# Altium PCB TRAY5 V4.PcbDoc
Units mm, origin at the board's own origin, x right, y up, seen from the top; angles counter-clockwise.
Board outline 187 x 33.02 mm, 2 copper layers (Top Layer, Bottom Layer), stack 1.571 mm thick; 50 components, 38 nets, 179 pads, 41 vias.
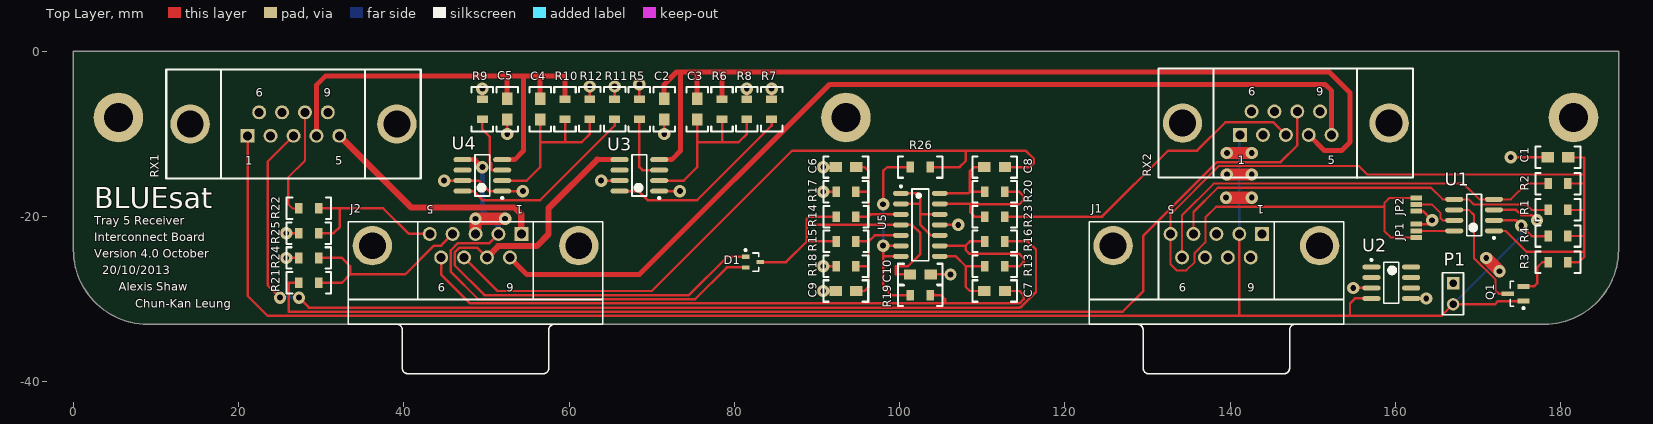
[diagram p0: Top Layer view]
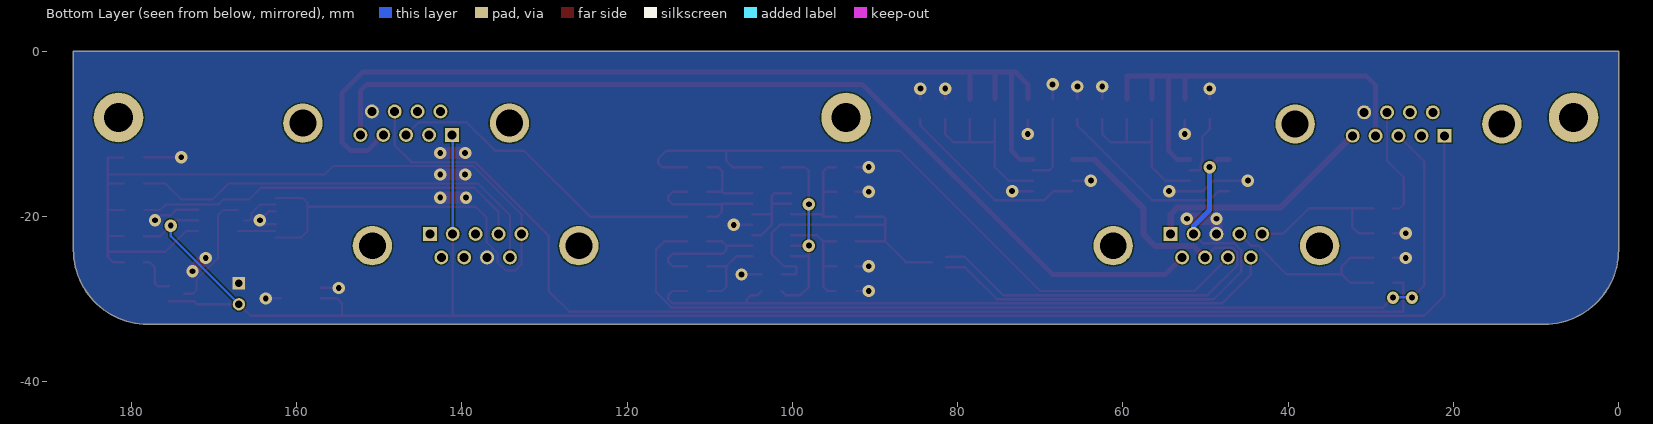
[diagram p1: Bottom Layer view, seen from below]

## Layer stack, top to bottom
Top Solder: solder mask 0.0102, Solder Resist, Dk 3.5
Top Layer: signal copper 0.0356
Dielectric1: core 1.5, FR-4, Dk 4.8
Bottom Layer: signal copper 0.0356
Bottom Solder: solder mask 0.0102, Solder Resist, Dk 3.5

## Board outline
9,-33.02 cw(c9,-24.02) 0,-24.02 0,0 187,0 187,-24.02 cw(c178,-24.02) 178,-33.02

## Design rules (kind name [scope] priority, off if disabled: settings)
Clearance [All] p1: gap=0.152
HoleSize [All] p1: absolutevalues=TRUE maxlimit=5 minlimit=0.3 maxpercent=80.000 minpercent=20.000
MinimumSolderMaskSliver [All] p1: minsoldermaskwidth=0.102
PolygonConnect [All] p1: connectstyle=Direct reliefconductorwidth=0.254 reliefentries=4 polygonreliefangle="90 Angle" airgapwidth=0.254
RoutingVias [All] p1: holewidth=0.4 width=0.6 viastyle="Through Hole" minholewidth=0.4 minwidth=0.6 maxholewidth=1 maxwidth=2
SilkToSilkClearance [All] p1: silktosilkclearance=0.1
SilkToSolderMaskClearance SilkscreenOverComponentPads [IsPad] p1: minsilkscreentomaskgap=0.254 clearancetoexposedcopper=TRUE
SolderMaskExpansion [All] p1: expansion=0.1
Width [All] p1: maxlimit=1.5 minlimit=0.203 preferedwidth=0.508
25 further rules are at their usual default settings.

## Classes and differential pairs
component class tempsens: U2
component class ADC: C1 JP1 JP2 P1 Q1 R1 R2 R3 R4 U1
component class Tray5: C2 C3 C4 C5 C6 C7 C8 C9 C10 D1 J1 J2 R5 R6 R7 R8 R9 R10 R11 R12 R13 R14 R15 R16 R17 R18 R19 R20 R21 R22 R23 R24 R25 R26 RX1 RX2 U3 U4 U5

## Components (designator, comment, footprint, x,y, rotation, side; value= is the part's Value field where it differs from the comment)
C1 "0805 Cap" "0805 Cap" 179.675,-12.825 r180 top
C2 "0805 Cap" "0805 Cap" 71.5,-7 r270 top
C3 "0805 Cap" "0805 Cap" 75.5,-7 r270 top
C4 "0805 Cap" "0805 Cap" 56.5,-7 r270 top
C5 "0805 Cap" "0805 Cap" 52.5,-7 r270 top
C6 "0805 Cap" "0805 Cap" 93.5,-14 r180 top
C7 "0805 Cap" "0805 Cap" 111.5,-29 r180 top
C8 "0805 Cap" "0805 Cap" 111.5,-14 r180 top
C9 "0805 Cap" "0805 Cap" 93.5,-29 r180 top
C10 "0805 Cap" "0805 Cap" 102.5,-27 r0 top
D1 "BAT54CW" NXP-SOT323-3_L 82.25,-25.5 r0 top
J1 "D Connector 9" DSUB1.385-2H9 138.33,-33.02 r180 top locked
J2 "D Connector 9" DSUB1.385-2H9 48.67,-33.02 r180 top locked
JP1 "Jumper Select" SOLDER_JUMPER_3_A 162.53,-21.715 r270 top
JP2 "Jumper Select" SOLDER_JUMPER_3_A 162.53,-18.54 r90 top
P1 "Header 2" HDR1X2 166.975,-28.065 r270 top
Q1 "DMP2004K" DMP2004KDITR-ND 174.595,-29.335 r180 top
R1 "0805 Resistor" "0805 Resistor" 179.675,-19.175 r180 top
R2 "0805 Resistor" "0805 Resistor" 179.675,-16 r180 top
R3 "0603 Resistor" "0805 Resistor" 179.675,-25.525 r180 top
R4 "0603 Resistor" "0805 Resistor" 179.675,-22.35 r180 top
R5 "0805 Resistor" "0805 Resistor" 68.5,-7 r270 top
R6 "0805 Resistor" "0805 Resistor" 78.5,-7 r270 top
R7 "0805 Resistor" "0805 Resistor" 84.5,-7 r90 top
R8 "0805 Resistor" "0805 Resistor" 81.5,-7 r90 top
R9 "0805 Resistor" "0805 Resistor" 49.5,-7 r270 top
R10 "0805 Resistor" "0805 Resistor" 59.5,-7 r270 top
R11 "0805 Resistor" "0805 Resistor" 65.5,-7 r90 top
R12 "0805 Resistor" "0805 Resistor" 62.5,-7 r90 top
R13 "0805 Resistor" "0805 Resistor" 111.5,-26 r180 top
R14 "0805 Resistor" "0805 Resistor" 93.5,-20 r0 top
R15 "0805 Resistor" "0805 Resistor" 93.5,-23 r0 top
R16 "0805 Resistor" "0805 Resistor" 111.5,-23 r180 top
R17 "0805 Resistor" "0805 Resistor" 93.5,-17 r180 top
R18 "0805 Resistor" "0805 Resistor" 93.5,-26 r180 top
R19 "0805 Resistor" "0805 Resistor" 102.5,-29.5 r180 top
R20 "0805 Resistor" "0805 Resistor" 111.5,-17 r180 top
R21 "0805 Resistor" "0805 Resistor" 28.5,-28 r0 top
R22 "0805 Resistor" "0805 Resistor" 28.5,-19 r0 top
R23 "0805 Resistor" "0805 Resistor" 111.5,-20 r180 top
R24 "0805 Resistor" "0805 Resistor" 28.5,-25 r180 top
R25 "0805 Resistor" "0805 Resistor" 28.5,-22 r180 top
R26 "0805 Resistor" "0805 Resistor" 102.5,-14 r180 top
RX1 "D Connector 9" "DSUB Upright" 26.641,-8.792 r180 top locked
RX2 "D Connector 9" "DSUB Upright" 146.736,-8.687 r180 top
U1 "DS24820Z+_ND" DS2482-100 169.515,-19.81 r180 top
U2 "TO-92" DS18S20 159.5,-28 r0 top
U3 "LT1120A" "SOIC8 - LT1120A" 68.5,-15 r180 top
U4 "LT1120A" "SOIC8 - LT1120A" 49.5,-15 r180 top
U5 "LM6134AIM/NOPB" M14A_L 102.5,-21 r0 top

## Footprints (in the part's own frame and the unit in brackets; to place one, negate y for a bottom-side part, rotate by r counter-clockwise, add the part's x,y. Pads: shape width x height; smd on the part's side, far side on the other; paste and mask are expansions set on the pad)
"0805 Cap" [mm] "0805 Capacitor"
  rect 1.5x1.25 smd: 1(1.25,0) 2(-1.25,0)
  silkscreen extent -2.7,-1.3 2.7,1.3, body extent -1,-0.63 1.1,0.63, height 0.9
"0805 Resistor" [mm] "0805 Resistor"
  rect 0.9x1.3 smd: 1(1.2,0) 2(-1.2,0)
  silkscreen extent -2.7,-1.3 2.7,1.3, body extent -1,-0.63 1.1,0.63, height 0.6
DMP2004KDITR-ND [mm] "SOT23, 3-Leads, Body 3.0x2.5mm (max), Pitch 0.89mm, IPC Medium Density"
  rect 1.5x0.6 smd: 1(-0.9,0.89) 2(-0.9,-0.89) 3(1,0)
  silkscreen extent -1.03,-1.5 0.7,1.86, body extent -0.7,-1.5 0.7,1.5, height 1.2
DS18S20 [mm] "SOIC, 8-Leads, Body 5.0x4.0mm (max), Pitch 1.27mm, IPC Medium Density"
  oval 2.2x0.6 smd: 1(-2.4,1.905) 2(-2.4,0.635) 3(-2.4,-0.635) 4(-2.4,-1.905) 5(2.4,-1.905) 6(2.4,-0.635) 7(2.4,0.635) 8(2.4,1.905)
  silkscreen extent -2.52,-2.5 0.9,2.88, body extent -2,-2.5 2,2.5, height 1.75
DS2482-100 [mm] "SOIC, 8-Leads, Body 5.0x4.0mm (max), Pitch 1.27mm, IPC Medium Density"
  oval 2.2x0.6 smd: 1(-2.4,1.905) 2(-2.4,0.635) 3(-2.4,-0.635) 4(-2.4,-1.905) 5(2.4,-1.905) 6(2.4,-0.635) 7(2.4,0.635) 8(2.4,1.905)
  silkscreen extent -2.53,-2.5 0.9,2.88, body extent -2,-2.5 2,2.5, height 1.75
DSUB1.385-2H9 [mm] "Connector; D Subminiature; 9 Position; Right Angle; Pitch 1.385 mm"
  rect 1.69x1.69 hole 1.09: 1(-5.54,-10.92)
  round 1.69 hole 1.09: 2(-2.77,-10.92) 3(0,-10.92) 4(2.77,-10.92) 5(5.54,-10.92) 6(-4.155,-8.08) 7(-1.385,-8.08) 8(1.385,-8.08) 9(4.155,-8.08)
  round 4.76 hole 3.26: 10(-12.495,-9.5) 11(12.495,-9.5)
  silkscreen extent -15.4,-12.4 15.4,6
"DSUB Upright" [mm] "171-009-213R911"
  rect 1.69x1.69 hole 1.09: 1(5.54,1.42)
  round 1.69 hole 1.09: 2(2.77,1.42) 3(0,1.42) 4(-2.77,1.42) 5(-5.54,1.42) 6(4.153,-1.42) 7(1.384,-1.42) 8(-1.384,-1.42) 9(-4.153,-1.42)
  round 4.76 hole 3.26: 10(12.5,0) 11(-12.5,0)
  silkscreen extent -15.4,-6.6 15.4,6.6
HDR1X2 [mm] "Connector; Header; 2 Position"
  rect 1.5x1.5 hole 0.9: 1(0,0)
  round 1.5 hole 0.9: 2(2.54,0)
  silkscreen extent -1.27,-1.27 3.81,1.27
M14A_L [mm] "SOIC, 14-Leads, Body 8.6x3.9mm, Pitch 1.27mm, IPC High Density"
  oval 1.9x0.6 smd: 1(-2.35,3.81) 2(-2.35,2.54) 3(-2.35,1.27) 4(-2.35,0) 5(-2.35,-1.27) 6(-2.35,-2.54) 7(-2.35,-3.81) 8(2.35,-3.81) 9(2.35,-2.54) 10(2.35,-1.27) 11(2.35,0) 12(2.35,1.27) 13(2.35,2.54) 14(2.35,3.81)
  silkscreen extent -2.47,-4.35 1,4.78, body extent -2,-4.37 2,4.37, height 1.75
NXP-SOT323-3_L [mm] "SOT323, 3-Leads, Body 2x1.3mm, Pitch 0.65mm, IPC High Density"
  rect 0.9x0.508 smd: 1(-0.9,0.65) 2(-0.9,-0.65) 3(0.9,0)
  silkscreen extent -1.02,-1.1 0.7,1.57, body extent -0.7,-1.1 0.7,1.1, height 1
"SOIC8 - LT1120A" [mm] "SOIC, 8-Leads, Body 5.0x4.0mm (max), Pitch 1.27mm, IPC Medium Density"
  oval 2.2x0.6 smd: 1(-2.4,1.905) 2(-2.4,0.635) 3(-2.4,-0.635) 4(-2.4,-1.905) 5(2.4,-1.905) 6(2.4,-0.635) 7(2.4,0.635) 8(2.4,1.905)
  silkscreen extent -2.53,-2.5 0.9,2.88, body extent -1.99,-2.5 1.99,2.5, height 1.75
SOLDER_JUMPER_3_A [mm]
  rect 0.6x1.4 smd: 1(0.8,0) 2(0,0) 3(-0.8,0)

## Part data
C1: library part "0805 MLCC - X7R, 10%", "0805 MLCC - X7R, 10%"
C2 C3 C4 C5 C6 C7 C8 C9 C10: library part "0805 MLCC - NP0, 5%", "0805 MLCC - NP0, 5%"
D1: library part CMP-0417-00001-1, "SOT-323 Plastic-Encapsulated Diode"
J1 J2: "Receptacle Assembly, 9 Position, Right Angle"
JP1 JP2: library part "Header 3", "Header, 3-Pin"
P1: "Header, 2-Pin"
Q1: "MOSFET P-CH 20V 600MA SOT23-3"
R1 R2 R5 R6 R7 R8 R9 R10 R11 R12 R13 R14 R15 R16 R17 R18 R19 R20 R21 R22 R23 R24 R25 R26: library part "0805 Thick Film Resistor 1%", "0805 Thick Film Resistor 1%"
R3 R4: library part "0603 Thick Film Resistor 1%", "0603 Thick Film Resistor 1%"
RX1 RX2: "Receptacle Assembly, 9 Position, Upright"
U1: "I2C to 1-Wire Master"
U2: library part DS18S20, "1-Wire Digital Thermometer"
U3 U4: "Low Dropout Regulator"
U5: library part CMP-0055-00748-2, "Quad Low Power 10 MHz Rail-to-Rail I/O Operational Amplifier, 14-pin Narrow SOIC, Pb-Free"

## Free pads (board coordinates)
  round 6 hole 3.5: 0(5.45,-8) 0(93.5,-8) 0(181.55,-8)

## Via types
v1: diameter 1.5, hole 0.7, Top Layer to Bottom Layer, tented both sides, 41 vias

## Nets (pads, with @x,y where several pads share a name; then routed paths per layer and width w, separated by ;. In a path a pad name is that pad's centre, name@x,y a point inside that pad or via, vN(x,y) a via of type N, cw(c..) or ccw(c..) an arc to the next point about the centre after c; other vN are vias at no path point)
3V3_TELEM_RX: C1.2 J1.5 JP1.1 JP2.1 R1.2 R2.2 R3.2 R4.2 U1.1 | length 136.6
  Top Layer w0.254: 158.7,-18.8 138.3,-18.8 137,-20.1 137,-23.1 135.7,-24.4 135.7,-25.5 134.7,-26.5 133.5,-26.5 132.79,-25.79 J1.5 132.79,-19.71 138.629,-13.871 140.026,-13.871 142.174,-13.871 155.571,-13.871 156.6,-14.9 182.85,-14.9 ; JP1.1 159.415,-22.515 158.7,-21.8 158.7,-18.3 159.26,-17.74 JP2.1 ; U1.1 173.325,-21.715 175.865,-24.255 182.85,-24.255 ; R3.2 182.215,-25.525 182.85,-24.89 182.85,-24.255 ; R4.2 182.85,-22.35 ; R1.2 182.85,-19.175 ; R2.2 182.85,-16 ; C1.2 182.85,-12.825 182.85,-16 ; 182.85,-24.255 182.85,-22.35 ; 182.85,-22.35 182.85,-19.175 ; 182.85,-19.175 182.85,-16
8V0_RX1: C4.2 C5.2 R10.2 RX1.4 U4.4 | length 57
  Top Layer w0.6: RX1.4 29.411,-4.089 30.5,-3 54.5,-3 ; U4.4 53.405,-13.095 54.5,-12 54.5,-3 ; C5.2 52.5,-3 ; C4.2 56.5,-3 ; R10.2 59.5,-3 56.5,-3 ; 54.5,-3 56.5,-3
8V0_RX2: C2.2 C3.2 R6.2 RX2.4 U3.4 | length 117.7
  Top Layer w0.6: U3.4 72.405,-13.095 73.5,-12 73.5,-2.5 ; C2.2 71.5,-4 73,-2.5 75.5,-2.5 ; C3.2 75.5,-2.5 ; R6.2 78.5,-2.5 ; RX2.4 151.399,-12 153.5,-12 154.5,-11 154.5,-5 152,-2.5 78.5,-2.5 ; 75.5,-2.5 78.5,-2.5
9V1_RX1: D1.2 J2.2 U4.5 | length 59.5
  Top Layer w0.3: J2.2 50.29,-23.25 46.5,-23.25 45.685,-24.065 45.685,-26.685 49,-30 75.25,-30 79.1,-26.15 D1.2
  Top Layer w0.6: U4.5 48.595,-13.095 v1(49.5,-14)
  Bottom Layer w0.6: v1(49.5,-14) 49.5,-19.2 51.44,-21.14 J2.2
9V1_RX2: D1.1 J2.7 U3.5 | length 67.6
  Top Layer w0.3: J2.7 48.865,-23.75 46.75,-23.75 46.138,-24.362 46.138,-25.888 49.75,-29.5 74.5,-29.5 79.15,-24.85 D1.1
  Top Layer w0.6: 63.405,-13.095 U3.5
  Top Layer w0.762: J2.7 51.433,-23.562 56.062,-23.562 57.5,-22.123 57.5,-19 63.405,-13.095
13V6_RX1: J2.1 RX1.5 | length 28.4
  Top Layer w0.762: RX1.5 32.209,-10.212 40.896,-18.9 53.4,-18.9 54.21,-19.71 J2.1
13V6_RX2: J2.6 RX2.5 | length 115.8
  Top Layer w0.6: J2.6 54.885,-27 68.5,-27 91.5,-4 151.5,-4 152.276,-4.776 RX2.5 RX2.5@152.5,-9.883
AF_RX1: C7.2 J2.9 R19.2 | length 85.9
  Top Layer w0.3: J2.9 44.515,-27.015 48,-30.5 111.5,-30.5 ; R19.2@103.7,-29 104.2,-29.5 105,-29.5 105.5,-30 105.5,-30.5 114.5,-30.5 115,-30 115,-29.5 114.5,-29 C7.2
AF_RX1_IN: R16.2 RX1.3 | length 123.6
  Top Layer w0.3: v1(25,-29.8) 23.5,-28.3 23.5,-13.353 RX1.3 ; v1(27.3,-29.8) 28.5,-31 114.5,-31 114.548,-30.952 114.687,-30.952 116.5,-29.14 116.5,-24 115.5,-23 R16.2
  Bottom Layer w0.3: v1@25,-29.75 v1@27.3,-29.75
AF_RX2: C8.2 J2.8 R26.2 | length 88.2
  Top Layer w0.3: J2.8 51.345,-29 70,-29 87,-12 108,-12 ; R26.2 107.25,-14 108,-13.25 108,-12 ; C8.2 115.75,-14 116.25,-13.5 116.25,-13 115.25,-12 108,-12
AF_RX2_IN: R23.2 RX2.3 | length 39.4
  Top Layer w0.3: R23.2 124.5,-20 132.5,-12 136,-12 139.4,-8.6 145.229,-8.6 RX2.3
COS_RX1: J2.5 R22.1 R25.2 | length 19.8
  Top Layer w0.3: R25.2 31.5,-22 32.25,-21.25 32.25,-19 ; R22.1 32.25,-19 ; J2.5 40.6,-22.1 37.5,-19 32.25,-19
COS_RX1_IN: R22.2 RX1.8 | length 13.5
  Top Layer w0.254: R22.2 26.5,-19 26,-18.5 26,-15.25 28.025,-13.225 RX1.8
COS_RX2: J2.4 R21.1 R24.2 | length 23.9
  Top Layer w0.3: R21.1 32.5,-28 33.5,-27 ; R24.2 32.5,-25 33.5,-26 33.5,-27 ; J2.4 44.5,-23.5 43.66,-23.5 40.16,-27 33.5,-27
COS_RX2_IN: R21.2 RX2.8 | length 143.2
  Top Layer w0.3: R21.2 26.052,-28 26.052,-31.5 127,-31.5 129.5,-29 129.5,-22.3 138.4,-13.4 146.1,-13.4 148.12,-11.38 RX2.8
GND: C1.1 C2.1 C5.1 C6.1 C9.1 C10.1 J1.8 J2.3 JP1.3 JP2.3 P1.1 R5.2 R7.1 R8.1 R9.2 R11.1 R12.1 R17.1 R18.1 R24.1 R25.1 RX1.9 RX2.9 U1.3 U2.3 U2.5 U3.1 U3.7 U4.1 U4.7 U5.11 | length 78.2
  Top Layer w0.3: v1(25.75,-25) R24.1 ; v1(25.75,-22) R25.1 ; v1(44.865,-15.635) U4.7 49.035,-15.635 50.305,-16.905 v1(54.405,-16.905) ; R9.2 v1@49.5,-4 ; v1(52.5,-10) C5.1 ; R12.1 v1(62.5,-4.25) ; v1(63.865,-15.635) U3.7 ; R11.1 v1(65.5,-4.25) ; R5.2 v1(68.5,-4) ; U3.1 v1(73.405,-16.905) ; v1(71.5,-10) C2.1 ; R8.1 v1(81.5,-4.5) ; R7.1 v1(84.5,-4.5) ; v1(90.75,-29) C9.1 ; v1(90.75,-26) R18.1 ; v1(90.75,-17) R17.1 ; v1(90.75,-14) C6.1 ; C10.1 v1(106.15,-27) ; U5.11 v1(107.1,-21) ; v1(139.5,-17.7) v1@139.5,-17.1 ; v1(142.6,-17.7) v1@142.6,-17.1 ; v1(154.885,-28.635) U2.3 ; U2.5 v1(163.735,-29.905) ; JP1.3 163.965,-20.915 v1(164.435,-20.445) 163.33,-19.34 JP2.3 ; U1.3 174.595,-19.175 175.23,-19.81 176.5,-19.81 v1(177.135,-20.445) ; v1(173.96,-12.825) C1.1
  Top Layer w1.5: J2.3 v1(48.67,-20.25) v1(52.25,-20.25) ; v1(139.5,-17.7) v1(142.6,-17.7) ; v1(139.6,-14.9) v1(142.6,-14.9) ; v1(139.6,-12.3) v1(142.6,-12.3) ; v1(171,-25) v1(172.6,-26.6)
  other v1: 49.5,-4.5
NetC3_1: C3.1 R6.1 R8.2 U3.2 | length 22
  Top Layer w0.3: U3.2 73.865,-15.635 75.5,-14 75.5,-11 ; C3.1 75.5,-11 ; R6.1 78.5,-11 ; R8.2 81.5,-10 80.5,-11 78.5,-11 ; 75.5,-11 78.5,-11
NetC4_1: C4.1 R10.1 R12.2 U4.2 | length 22
  Top Layer w0.3: U4.2 54.865,-15.635 56.5,-14 56.5,-11 ; C4.1 56.5,-11 ; R10.1 59.5,-11 ; R12.2 62.5,-10 61.5,-11 59.5,-11 ; 56.5,-11 59.5,-11
NetC6_2: C6.2 R14.1 R17.2 U5.3 | length 14.3
  Top Layer w0.3: R14.1 96.25,-20 ; R17.2 96.25,-17 ; C6.2 95.75,-14 96.25,-14.5 96.25,-17 ; U5.3 96.52,-19.73 96.25,-20 ; 96.25,-20 96.25,-17
NetC7_1: C7.1 R13.1 U5.8 | length 10.9
  Top Layer w0.3: U5.8 106.81,-24.81 108,-26 ; C7.1 108.5,-29 108,-28.5 108,-26 ; R13.1 108,-26
NetC8_1: C8.1 R20.1 U5.14 | length 10
  Top Layer w0.3: U5.14 108.31,-17.19 108.5,-17 ; C8.1 109,-14 108.5,-14.5 108.5,-17 ; R20.1 108.5,-17
NetC9_2: C9.2 R15.1 R18.2 U5.5 | length 14.5
  Top Layer w0.3: R18.2 96.25,-26 ; R15.1 96.25,-23 ; C9.2 95.75,-29 96.25,-28.5 96.25,-26 ; U5.5 96.98,-22.27 96.25,-23 ; 96.25,-26 96.25,-23
NetJP1_2: JP1.2 U1.8 | length 4.6
  Top Layer w0.254: JP1.2 U1.8
NetJP2_2: JP2.2 U1.7 | length 5
  Top Layer w0.254: JP2.2 164.435,-18.54 165.464,-19.569 165.464,-20.204 165.705,-20.445 U1.7@166.34,-20.445
NetQ1_2: Q1.2 R3.1 | length 5.3
  Top Layer w0.3: Q1.2 176.755,-28.445 177.135,-28.065 177.135,-26.16 177.77,-25.525 R3.1
NetQ1_3: Q1.3 U1.6 | length 14.5
  Top Layer w0.254: U1.6 168.88,-19.175 169.515,-19.81 169.515,-25.015 172.1,-27.6 172.1,-28.9 172.535,-29.335 Q1.3
NetR5_1: R5.1 U3.3 | length 8.4
  Top Layer w0.3: R5.1 68.5,-14 68.865,-14.365 U3.3
NetR7_2: R7.2 U3.8 | length 23.4
  Top Layer w0.3: U3.8 68.405,-16.905 69.5,-18 75.5,-18 84.5,-9 R7.2
NetR9_1: R9.1 U4.3 | length 7.9
  Top Layer w0.3: R9.1 49.5,-9.45 50.4,-10.35 50.4,-13.412 50.552,-13.564 50.552,-14.252 50.665,-14.365 U4.3
NetR11_2: R11.2 U4.8 | length 23.4
  Top Layer w0.3: U4.8 48.405,-16.905 49.5,-18 56.5,-18 65.5,-9 R11.2
NetR13_2: R13.2 R16.1 U5.9 | length 16.6
  Top Layer w0.3: U5.9@104.85,-23.5 108,-23.5 ; R16.1 108.5,-23 108,-23.5 ; R13.2 114.5,-26 115,-25.5 115,-25 114.5,-24.5 108.46,-24.5 108,-24.04 108,-23.5
NetR20_2: R20.2 R23.1 U5.13 | length 16.3
  Top Layer w0.3: U5.13 108.54,-18.46 108.54,-19.46 109.08,-20 R23.1 ; 108.54,-18.5 114.5,-18.5 115,-18 115,-17.5 114.5,-17 R20.2
ONEWIRE: J1.2 P1.2 Q1.1 R4.1 RX1.1 RX2.1 U1.2 U2.4 | length 221.9
  Top Layer w0.3: RX1.1 21.101,-29.601 23.5,-32 141.1,-32 ; J1.2 141.1,-32 ; U2.4 155.095,-29.905 154.5,-30.5 154.5,-32 ; U1.2 174.595,-20.445 v1(175.23,-21.08) 176.5,-22.35 R4.1 ; Q1.1 172.435,-30.225 172.055,-30.605 P1.2 165.58,-32 154.5,-32 ; 141.1,-32 154.5,-32
  Bottom Layer w0.3: J1.2 RX2.1@141.1,-10.203 ; P1.2 175.23,-22.35 v1(175.23,-21.08)
SCL_TELEM_RX: J1.9 R2.1 U1.4 | length 52.6
  Top Layer w0.254: J1.9 134.175,-19.825 138,-16 168.245,-16 170.15,-17.905 U1.4 173.96,-17.905 175.865,-16 R2.1
SDA_TELEM_RX: J1.4 R1.1 U1.5 | length 47.9
  Top Layer w0.254: J1.4 135.56,-19.44 138.5,-16.5 164.3,-16.5 165.705,-17.905 U1.5 168.88,-17.905 169.515,-18.54 175.865,-18.54 176.5,-19.175 R1.1
VCC_OP: C10.2 D1.3 R14.2 R15.2 U5.4 | length 39.6
  Top Layer w0.3: D1.3 86.25,-25.5 88.75,-23 ; 88.75,-21 U5.4 101.5,-21 102.5,-22 102.5,-24.5 101,-26 99.5,-26 99.5,-27 C10.2 ; R15.2 88.75,-23 ; R14.2 89,-20 88.75,-20.25 88.75,-23
VGND: U5.1 U5.2 U5.10 U5.12 | length 13.5
  Top Layer w0.3: U5.2 102.46,-18.46 ; U5.1 102.19,-17.19 102.5,-17.5 102.5,-21 103.77,-22.27 U5.10 ; 102.52,-19.73 U5.12
VGND_OUT: R19.1 R26.1 U5.6 U5.7 | length 26.8
  Top Layer w0.3: 98,-24.81 U5.7 ; v1(98,-18.5) 98,-14.5 98.5,-14 R26.1 ; U5.6@100.15,-23.5 v1(98,-23.5) 98,-28.5 99,-29.5 100.8,-29.5 R19.1@101.3,-29
  Bottom Layer w0.3: v1(98,-23.5) 98,-24.04 v1(98,-18.5)
pads on no net: J1.1 J1.3 J1.6 J1.7 J1.10 J1.11 J2.10 J2.11 RX1.2 RX1.6 RX1.7 RX1.10 RX1.11 RX2.2 RX2.6 RX2.7 RX2.10 RX2.11 U2.1 U2.2 U2.6 U2.7 U2.8 U3.6 U4.6

## Polygon pours and split planes (outlines as drawn)
GND on Bottom Layer "Bottom Layer" (solid, pour order 5): 9,-33.02 cw(c9,-24.02) 0,-24.02 0,0 187,0 187,-24.02 cw(c178,-24.02) 178,-33.02

## Silkscreen, mask and mechanical layers (free items; w line width, h text height)
Top Overlay:
  text "BLUEsat" at 2.5,-19 h2.5
  text "Tray 5 Receiver" at 2.5,-21 h1
  text "Interconnect Board" at 2.5,-23 h1
  text "Version 4.0 October" at 2.5,-25 h1
  text "20/10/2013" at 3.5,-27 h1
  text "Alexis Shaw" at 5.5,-29 h1
  text "Chun-Kan Leung" at 7.5,-31 h1
Mechanical 1:
  drawing of 445 lines, arcs and shapes, not listed
  text "1" at -36.7,81 h1.52
  text "2" at -26.7,81 h1.52
  text "3" at -16.7,81 h1.52
  text "4" at -6.7,81 h1.52
  text "5" at 3.3,81 h1.52
  text "6" at 13.3,81 h1.52
  text "7" at 23.3,81 h1.52
  text "8" at 33.3,81 h1.52
  text "9" at 43.3,81 h1.52
  text "10" at 52.3,81 h1.52
  text "11" at 62.3,81 h1.52
  text "12" at 72.3,81 h1.52
  text "13" at 82.3,81 h1.52
  text "14" at 92.3,81 h1.52
  text "15" at 102.3,81 h1.52
  text "16" at 112.3,81 h1.52
  text "17" at 122.3,81 h1.52
  text "18" at 132.3,81 h1.52
  text "19" at 142.3,81 h1.52
  text "20" at 152.3,81 h1.52
  text "21" at 162.3,81 h1.52
  text "22" at 172.3,81 h1.52
  text "23" at 182.3,81 h1.52
  text "24" at 192.3,81 h1.52
  text "25" at 202.3,81 h1.52
  text "26" at 212.3,81 h1.52
  text "27" at 222.3,81 h1.52
  text "S" at -45.7,72.5 h1.52
  text "S" at 230.8,72.5 h1.52
  text "R" at -45.7,62.5 h1.52
  text "R" at 230.8,62.5 h1.52
  text "Q" at -45.7,52.5 h1.52
  text "Q" at 230.8,52.5 h1.52
  text "P" at -45.7,42.5 h1.52
  text "P" at 230.8,42.5 h1.52
  text "O" at -45.7,32.5 h1.52
  text "O" at 230.8,32.5 h1.52
  text "N" at -45.7,22.5 h1.52
  text "N" at 230.8,22.5 h1.52
  text "M" at -45.7,12.5 h1.52
  text "M" at 230.8,12.5 h1.52
  text "L" at -45.7,2.5 h1.52
  text "L" at 230.8,2.5 h1.52
  text "K" at -45.7,-7.5 h1.52
  text "K" at 230.8,-7.5 h1.52
  text "J" at -45.7,-17.5 h1.52
  text "J" at 230.8,-17.5 h1.52
  text "I" at -45.7,-27.5 h1.52
  text "I" at 230.8,-27.5 h1.52
  text "H" at -45.7,-37.5 h1.52
  text "H" at 230.8,-37.5 h1.52
  text "G" at -45.7,-47.5 h1.52
  text "G" at 230.8,-47.5 h1.52
  text "Layer" at -29.976,-52.687 h1.52
  text "Name" at -19.564,-52.687 h1.52
  text "Material" at 4.051,-52.687 h1.52
  text "Thickness" at 25.889,-52.687 h1.52
  text "Constant" at 42.395,-52.687 h1.52
  text "Board Layer Stack" at 56.87,-52.687 h1.52
  text "1" at -29.976,-55.735 h1.52
  text "Top Paste" at -19.564,-55.735 h1.52
  text "F" at -45.7,-57.5 h1.52
  text "F" at 230.8,-57.5 h1.52
  text "2" at -29.976,-58.783 h1.52
  text "Top Overlay" at -19.564,-58.783 h1.52
  text "3" at -29.976,-61.831 h1.52
  text "Top Solder" at -19.564,-61.831 h1.52
  text "Solder Resist" at 4.051,-61.831 h1.52
  text "0.40mil" at 25.889,-61.831 h1.52
  text "3.5" at 42.395,-61.831 h1.52
  text "4" at -29.976,-64.879 h1.52
  text "Top Layer" at -19.564,-64.879 h1.52
  text "Copper" at 4.051,-64.879 h1.52
  text "1.40mil" at 25.889,-64.879 h1.52
  text "E" at -45.7,-67.5 h1.52
  text "E" at 230.8,-67.5 h1.52
  text "5" at -29.976,-67.927 h1.52
  text "Dielectric1" at -19.564,-67.927 h1.52
  text "FR-4" at 4.051,-67.927 h1.52
  text "59.05mil" at 25.889,-67.927 h1.52
  text "4.8" at 42.395,-67.927 h1.52
  text "6" at -29.976,-70.975 h1.52
  text "Bottom Layer" at -19.564,-70.975 h1.52
  text "Copper" at 4.051,-70.975 h1.52
  text "1.40mil" at 25.889,-70.975 h1.52
  text "7" at -29.976,-74.023 h1.52
  text "Bottom Solder" at -19.564,-74.023 h1.52
  text "Solder Resist" at 4.051,-74.023 h1.52
  text "0.40mil" at 25.889,-74.023 h1.52
  text "3.5" at 42.395,-74.023 h1.52
  text "8" at -29.976,-77.071 h1.52
  text "Bottom Overlay" at -19.564,-77.071 h1.52
  text "D" at -45.7,-77.5 h1.52
  text "D" at 230.8,-77.5 h1.52
  text "9" at -29.976,-80.119 h1.52
  text "Bottom Paste" at -19.564,-80.119 h1.52
  text "C" at -45.7,-87.5 h1.52
  text "C" at 230.8,-87.5 h1.52
  text "B" at -45.7,-97.5 h1.52
  text "B" at 230.8,-97.5 h1.52
  text "A" at -45.7,-107.5 h1.52
  text "A" at 230.8,-107.5 h1.52
  text "1" at -36.7,-116.5 h1.52
  text "2" at -26.7,-116.5 h1.52
  text "3" at -16.7,-116.5 h1.52
  text "4" at -6.7,-116.5 h1.52
  text "5" at 3.3,-116.5 h1.52
  text "6" at 13.3,-116.5 h1.52
  text "7" at 23.3,-116.5 h1.52
  text "8" at 33.3,-116.5 h1.52
  text "9" at 43.3,-116.5 h1.52
  text "10" at 52.3,-116.5 h1.52
  text "11" at 62.3,-116.5 h1.52
  text "12" at 72.3,-116.5 h1.52
  text "13" at 82.3,-116.5 h1.52
  text "14" at 92.3,-116.5 h1.52
  text "15" at 102.3,-116.5 h1.52
  text "16" at 112.3,-116.5 h1.52
  text "17" at 122.3,-116.5 h1.52
  text "18" at 132.3,-116.5 h1.52
  text "19" at 142.3,-116.5 h1.52
  text "20" at 152.3,-116.5 h1.52
  text "21" at 162.3,-116.5 h1.52
  text "22" at 172.3,-116.5 h1.52
  text "23" at 182.3,-116.5 h1.52
  text "24" at 192.3,-116.5 h1.52
  text "25" at 202.3,-116.5 h1.52
  text "26" at 212.3,-116.5 h1.52
  text "27" at 222.3,-116.5 h1.52
Drill Drawing:
  circle w0.025: c111.079,-68.175 r0.635
  lines w0.025: 110.444,-84.05 111.714,-84.05 111.714,-82.78 110.444,-82.78 110.444,-84.05 ; 110.444,-78.97 111.714,-78.97 111.079,-80.24 110.444,-78.97 ; 110.444,-76.112 110.762,-76.112 111.079,-76.43 111.397,-76.112 111.714,-76.112 111.397,-75.795 111.714,-75.477 111.397,-75.477 111.079,-75.16 110.762,-75.477 110.444,-75.477 110.762,-75.795 110.444,-76.112 ; 110.444,-72.62 111.079,-72.302 111.714,-72.62 111.397,-71.985 111.714,-71.35 111.079,-71.667 110.444,-71.35 110.762,-71.985 110.444,-72.62
  lines w0.381: 108.714,-85.193 207.24,-85.193 ; 108.714,-66.143 207.24,-66.143 ; 122.706,-89.003 122.706,-62.333 ; 140.431,-89.003 140.431,-62.333 ; 174.609,-89.003 174.609,-62.333 ; 187.458,-89.003 187.458,-62.333 ; 108.714,-89.003 207.24,-89.003 207.24,-62.333 108.714,-62.333 108.714,-89.003
  text "Symbol" at 111,-65 h1.83
  text "Hit Count" at 123.849,-65 h1.83
  text "Finished Hole Size" at 141.574,-65 h1.83
  text "Plated" at 175.752,-65 h1.83
  text "Hole Type" at 188.601,-65 h1.83
  text "2" at 123.849,-68.81 h1.52
  text "0.900mm (35.43mil)" at 141.574,-68.81 h1.52
  text "PTH" at 175.752,-68.81 h1.52
  text "Round" at 188.601,-68.81 h1.52
  text "3" at 123.849,-72.62 h1.52
  text "3.500mm (137.80mil)" at 141.574,-72.62 h1.52
  text "PTH" at 175.752,-72.62 h1.52
  text "Round" at 188.601,-72.62 h1.52
  text "8" at 123.849,-76.43 h1.52
  text "3.260mm (128.35mil)" at 141.574,-76.43 h1.52
  text "PTH" at 175.752,-76.43 h1.52
  text "Round" at 188.601,-76.43 h1.52
  text "36" at 123.849,-80.24 h1.52
  text "1.090mm (42.91mil)" at 141.574,-80.24 h1.52
  text "PTH" at 175.752,-80.24 h1.52
  text "Round" at 188.601,-80.24 h1.52
  text "41" at 123.849,-84.05 h1.52
  text "0.700mm (27.56mil)" at 141.574,-84.05 h1.52
  text "PTH" at 175.752,-84.05 h1.52
  text "Round" at 188.601,-84.05 h1.52
  text "90 Total" at 123.849,-87.86 h1.52

## Panel: embedded boards
"TRAY5 V4.PcbDoc" at -5.25,4.275, 1 rows x 1 columns, spacing 0 x 0, rotation 0

## Text inside footprints (layer, text, board x,y; h text height)
J1: Top Overlay "6" at 142.985,-28.045 h1 r180; Top Overlay "9" at 134.675,-28.045 h1 r180; Top Overlay "5" at 133.29,-18.645 h1 r180; Top Overlay "1" at 144.12,-18.645 h1 r180
J2: Top Overlay "6" at 53.325,-28.045 h1 r180; Top Overlay "9" at 45.015,-28.045 h1 r180; Top Overlay "5" at 43.63,-18.645 h1 r180; Top Overlay "1" at 54.46,-18.645 h1 r180
RX1: Top Overlay "1" at 20.799,-13.745 h1; Top Overlay "5" at 31.721,-13.745 h1; Top Overlay "6" at 22.069,-5.49 h1; Top Overlay "9" at 30.324,-5.49 h1
RX2: Top Overlay "1" at 140.894,-13.64 h1; Top Overlay "5" at 151.816,-13.64 h1; Top Overlay "6" at 142.164,-5.385 h1; Top Overlay "9" at 150.419,-5.385 h1